# Altium PCB opm.PcbDoc (part 1 of 6)
Units mil, origin at the board's own origin, x right, y up, seen from the top; angles counter-clockwise.
Board outline 4280 x 1445 mil, 4 copper layers (Signal Plane 1, Ground, Power, Signal Plane 2), stack 59.778 mil thick; 104 components, 61 nets, 369 pads, 159 vias.
Unrouted connection lines stored in the file: 4.
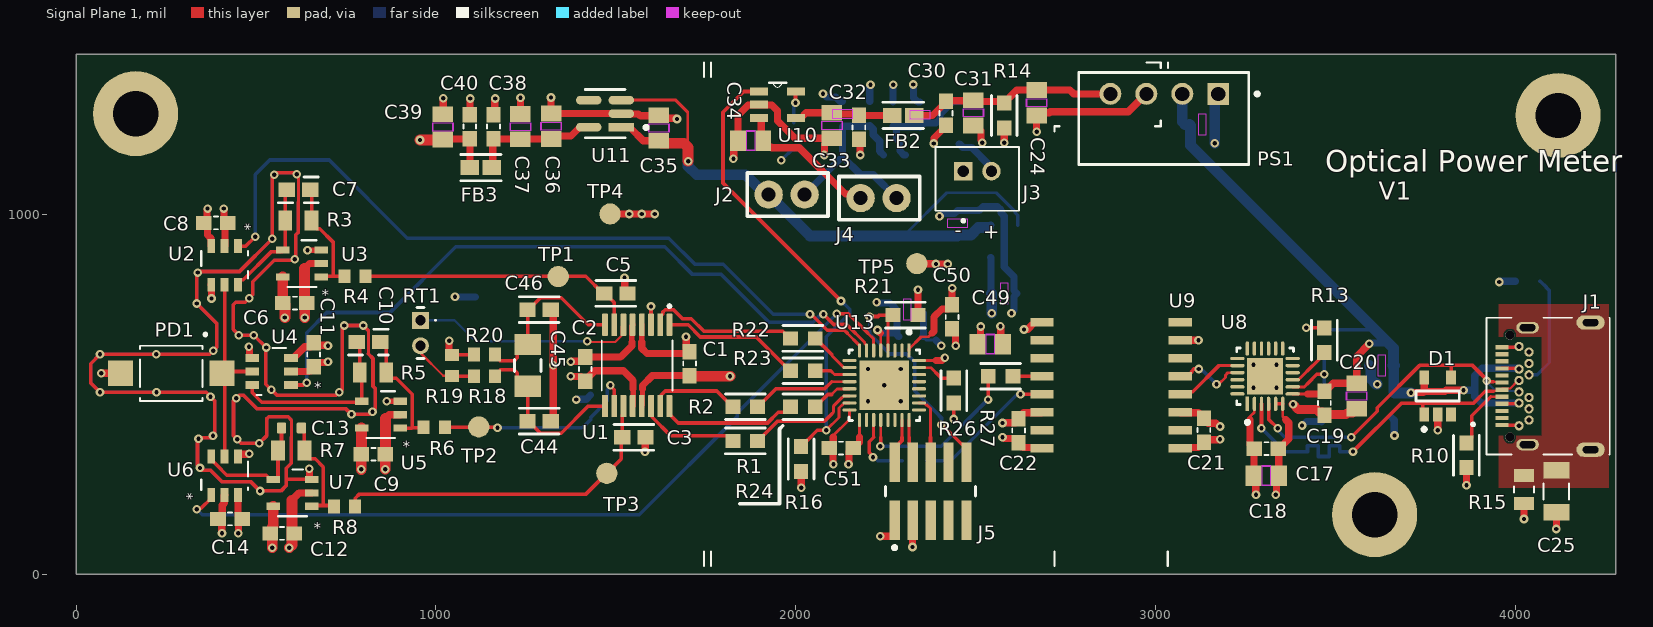
[diagram p0: Signal Plane 1 view]
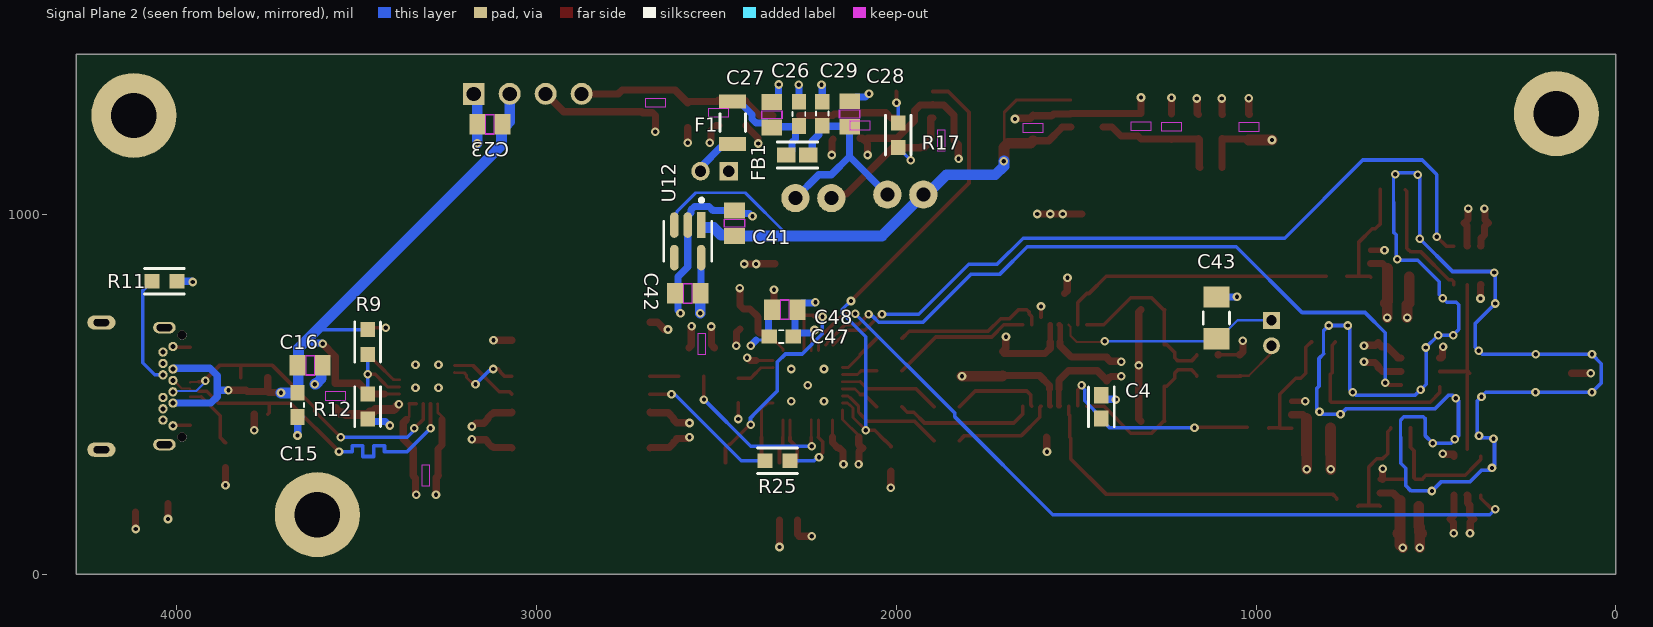
[diagram p1: Signal Plane 2 view, seen from below]
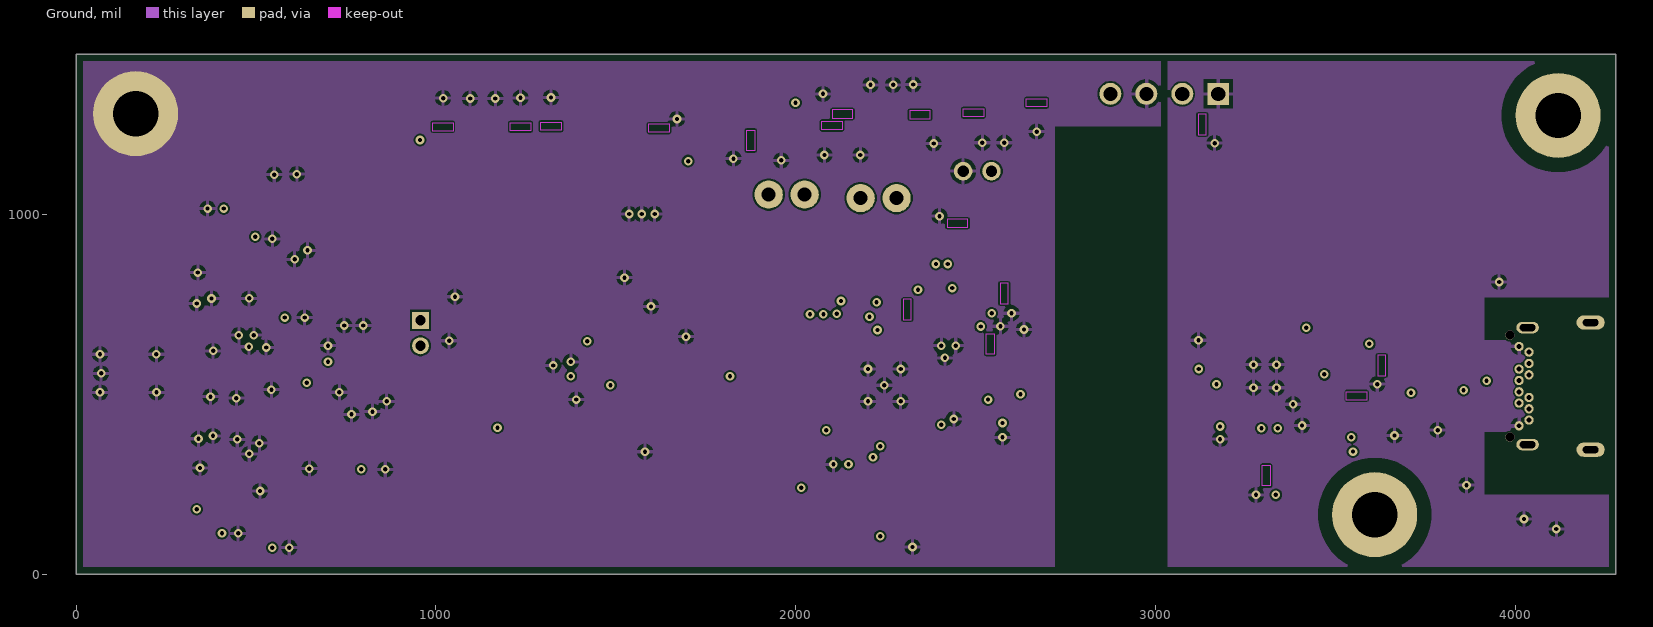
[diagram p2: Ground]
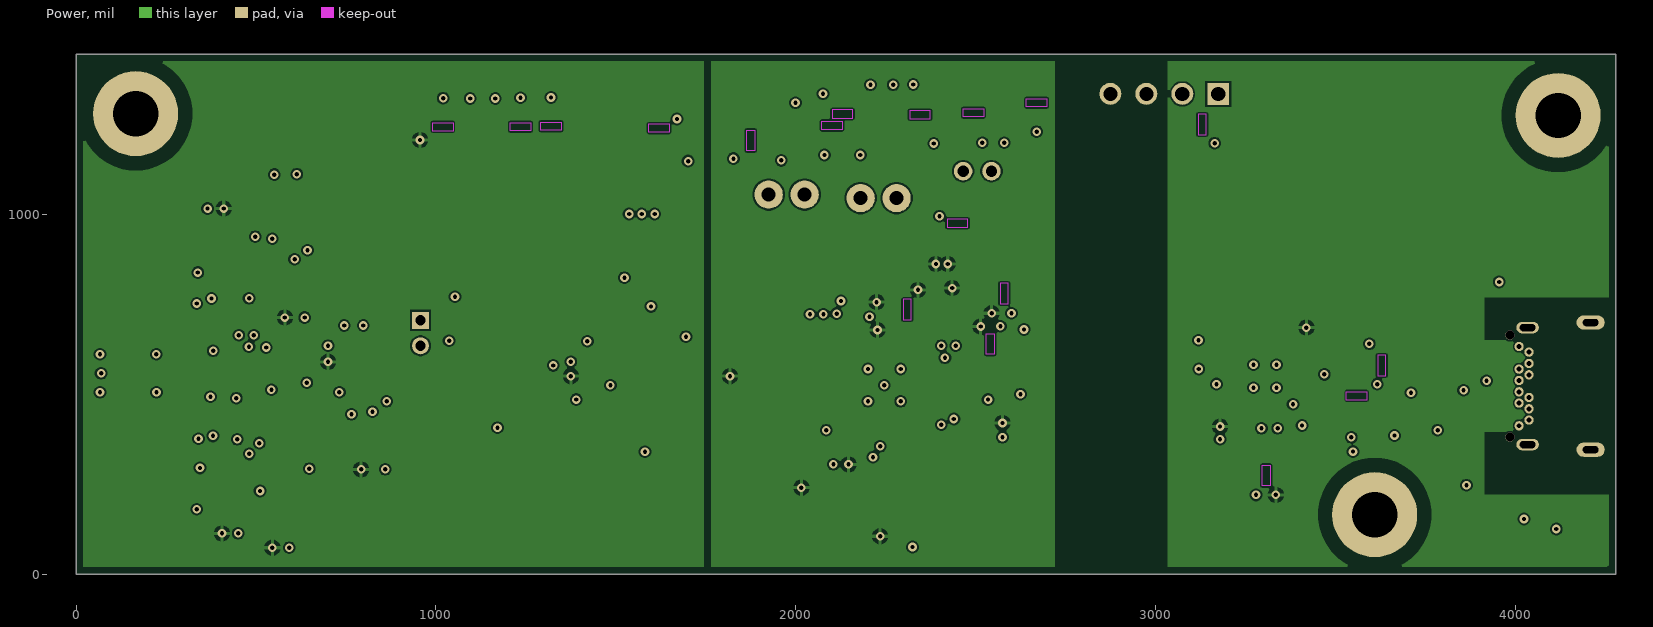
[diagram p3: Power]
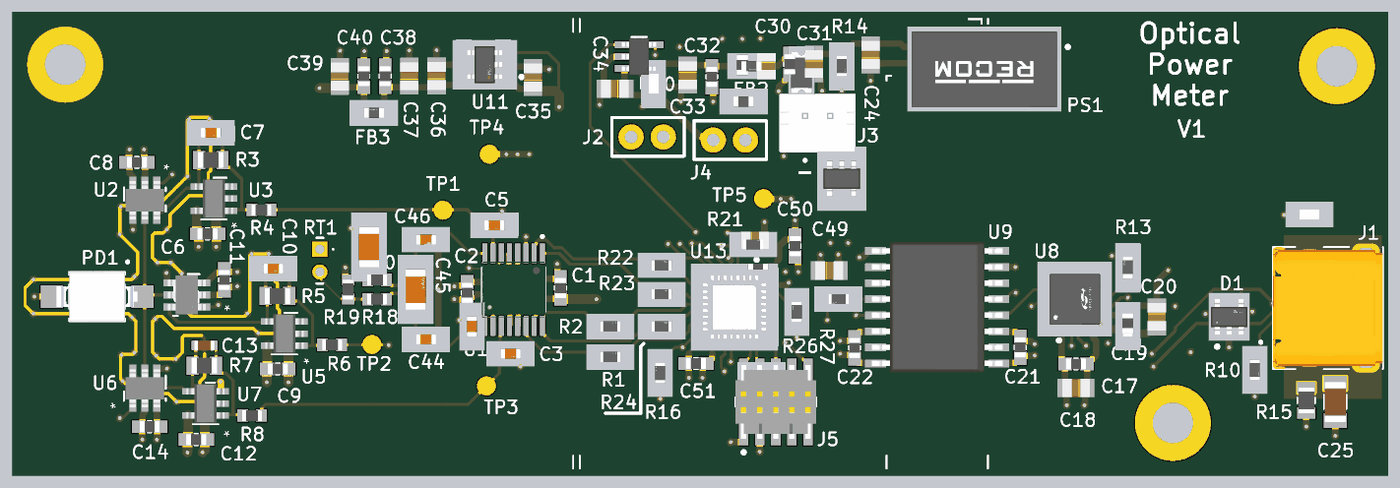
[diagram p5: 3D render of the assembled board from above, using the file's embedded part models]
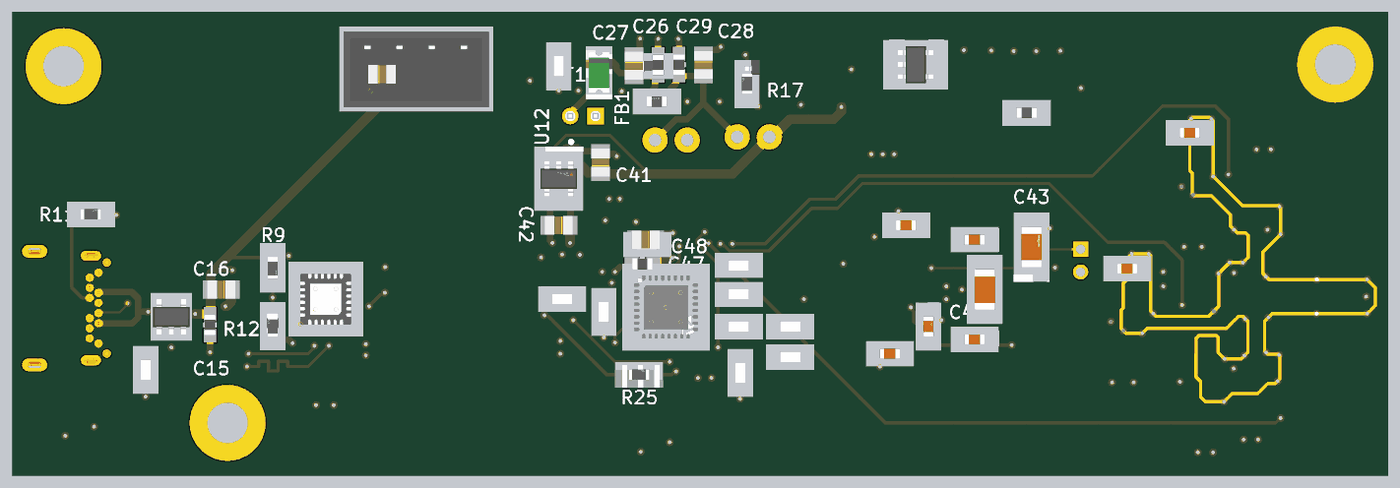
[diagram p6: 3D render of the assembled board from below, using the file's embedded part models]

## Layer stack, top to bottom
Top Solder: solder mask 0.4, Solder Resist, Dk 3.5
Signal Plane 1: signal copper 1.4
Dielectric 2: prepreg 7.8, PP-006, Dk 4.1
Ground: signal copper 0.689
Dielectric 1: dielectric 40, FR-4, Dk 4.8
Power: signal copper 0.689
Dielectric 3: prepreg 7.8, PP-006, Dk 4.1
Signal Plane 2: signal copper 1.4
Bottom Solder: solder mask 0.4, Solder Resist, Dk 3.5

## Board outline
0,0 0,1445 4280,1445 4280,0

## Design rules (kind name [scope] priority, off if disabled: settings)
Clearance Clearance_MountingHoles [IsPad AND (PadXSize_TopLayer > 236)] p1: gap=40 ignorepadtopadclearanceinfootprint=FALSE
Clearance Clearance_Power_to_Analog [InNetClass('Analog_Inputs') vs InNetClass('Power_Nets')] p2: gap=20 ignorepadtopadclearanceinfootprint=FALSE
Clearance [All] p3: gap=5 ignorepadtopadclearanceinfootprint=FALSE
DiffPairsRouting [All] p1: maxlimit=10 minlimit=10 mostfreqgap=10 toplayer_minwidth=6 toplayer_maxwidth=15 toplayer_prefwidth=15 midlayer1_minwidth=6 midlayer1_maxwidth=15 midlayer1_prefwidth=15 midlayer2_minwidth=6 midlayer2_maxwidth=15 midlayer2_prefwidth=15 bottomlayer_minwidth=6 bottomlayer_maxwidth=15 bottomlayer_prefwidth=15 maxuncoupledlength=500
PolygonConnect ShieldConnect [InNet('SHIELD_POUR')] p1: connectstyle=Direct reliefconductorwidth=10 reliefentries=4 polygonreliefangle="90 Angle" airgapwidth=10
PolygonConnect Faraday [IsPad AND (InNet('DGND')) AND (PadXSize_BottomLayer > 236)] p2: connectstyle=Direct reliefconductorwidth=10 reliefentries=4 polygonreliefangle="90 Angle" airgapwidth=10
PolygonConnect [All] p3: connectstyle=Relief reliefconductorwidth=10 reliefentries=4 polygonreliefangle="90 Angle" airgapwidth=10
RoomDefinition USB_Room [False] p1: confinementstyle=ConfineIn formatcopy=TRUE lockcomponents=FALSE outline 3940,405 3985,405 3985,645 3940,645
RoomDefinition CP2102_Room [False vs False] p2: confinementstyle=ConfineIn formatcopy=TRUE lockcomponents=FALSE outline 3423.18,669.21 3178.18,669.21 3178.18,429.21 3423.18,429.21
RoomDefinition ADC_Room_1 [False vs False] p3: confinementstyle=ConfineIn formatcopy=TRUE lockcomponents=FALSE outline 1450,735 1670,735 1670,645 1450,645
RoomDefinition ADC_Room_2 [False vs False] p4: confinementstyle=ConfineIn formatcopy=TRUE lockcomponents=FALSE outline 1450,425 1670,425 1670,515 1450,515
RoomDefinition STM32_Room [False vs False] p5: confinementstyle=ConfineIn formatcopy=TRUE lockcomponents=FALSE outline 2100,670 2390,670 2390,380 2100,380
RoutingVias [All] p1: holewidth=12 width=24 viastyle="Through Hole" minholewidth=12 minwidth=24 maxholewidth=12 maxwidth=24
SilkToSolderMaskClearance Silk_Clearance_Guard_Ring [InNet('DGND')] p1: minsilkscreentomaskgap=2 clearancetoexposedcopper=FALSE
SilkToSolderMaskClearance [IsPad] p2: minsilkscreentomaskgap=10 clearancetoexposedcopper=TRUE
SolderMaskExpansion [All] p1: expansion=4 istentingtop=FALSE
SupplyNets "Schematic Supply Nets_7" [InNet('+3V3_D')] p1: voltage=0.000
SupplyNets "Schematic Supply Nets_6" [InNet('DGND')] p2: voltage=0.000
SupplyNets "Schematic Supply Nets_5" [InNet('VBUS')] p3: voltage=0.000
SupplyNets "Schematic Supply Nets_4" [InNet('VBAT')] p4: voltage=0.000
SupplyNets "Schematic Supply Nets_3" [InNet('USB_GND')] p5: voltage=0.000
SupplyNets "Schematic Supply Nets_2" [InNet('VBUS_3V3')] p6: voltage=0.000
SupplyNets "Schematic Supply Nets_1" [InNet('+3V3_A')] p7: voltage=0.000
SupplyNets "Schematic Supply Nets" [InNet('VBUS_ISO')] p8: voltage=0.000
Width Width_USB_Pins [WithinRoom('USB_Room')] p1: maxlimit=10 minlimit=10 preferedwidth=10
Width Width_CP2102_Pins [WithinRoom('CP2102_Room')] p2: maxlimit=8 minlimit=8 preferedwidth=8
Width Width_ADC_Power [(WithinRoom('ADC_Room_1') or WithinRoom('ADC_Room_2')) and InNetClass('Power_Nets')] p3: maxlimit=15 minlimit=15 preferedwidth=15
Width Width_STM32_Pins [WithinRoom('STM32_Room')] p4: maxlimit=8 minlimit=8 preferedwidth=8
Width Power_Width [InNetClass('Power_Nets')] p5: maxlimit=30 minlimit=15 preferedwidth=20
Width [All] p6: maxlimit=10 minlimit=6 preferedwidth=10
28 further rules are at their usual default settings.

## Classes and differential pairs
net class Analog_Input: NetC7_1 NetC7_2 NetC10_1 NetC10_2 NetC13_1 NetC13_2 NetPD1_K
net class Power_Nets: +3V3_A +3V3_D DGND NetC26_1 NetC28_2 NetC32_2 NetC34_1 NetC36_1 NetF1_2 USB_GND VBAT VBUS VBUS_3V3 VBUS_ISO
component class U_TMP: C43 C44 C45 C46 R18 R19 R20 RT1
component class U_TIA3: C12 C13 C14 pvpt R7 R8 U6 U7
component class U_TIA2: C9 C10 C11 R5 R6 U4 U5
component class U_TIA1: C6 C7 C8 R3 R4 U2 U3
component class U_PWR_REG: C35 C36 C37 C38 C39 C40 C41 C42 FB3 U11 U12
component class U_MCU: C47 C48 C49 C50 C51 J5 R21 R22 R23 R24 R25 R26 R27 U13
component class U_INT: C15 C16 C17 C18 C19 C20 C21 C22 C23 C24 C25 D1 PS1 R9 R10 R11 R12 R13 R14 R15 U8 U9
component class U_CHARGE: C30 C31 C32 C33 C34 FB2 R16 R17 U10
component class U_BAT: C26 C27 C28 C29 F1 FB1 J2 J3 J4
component class U_AFE: C1 C2 C3 C4 C5 R1 R2 U1
differential pair D: +D_P -D_N
differential pair Temp: +Temp_P -Temp_N

## Components (designator, comment, footprint, x,y, rotation, side; value= is the part's Value field where it differs from the comment)
C1 "0.1uF" CC0603JRX7R8BB104 1705,585 r90 top value=100nF
C2 "0.1uF" CC0603JRX7R8BB104 1415,570 r90 top value=100nF
C3 "10nF" GRM1885C1H103JA01D 1550,380 r0 top
C4 "10nF" GRM1885C1H103JA01D 1430,465 r90 bottom
C5 "10nF" GRM1885C1H103JA01D 1500,780 r0 top
C6 "0.1uF" CC0603JRX7R8BB104 607.56,753.04 r0 top value=100nF
C7 "56pF" GCM1885C2A560JA16D 617.56,1068.04 r0 top
C8 "0.1uF" CC0603JRX7R8BB104 388,976 r180 top value=100nF
C9 "0.1uF" CC0603JRX7R8BB104 826,333 r0 top value=100nF
C10 "10pF" GCM1885C2A100JA16D 812,645 r0 top
C11 "0.1uF" CC0603JRX7R8BB104 660,610 r90 top value=100nF
C12 "0.1uF" CC0603JRX7R8BB104 572.56,113.04 r0 top value=100nF
C13 "3pF" AQ0603BRNPO9BN3R0 598,406 r0 top
C14 "0.1uF" CC0603JRX7R8BB104 427.56,153.04 r0 top value=100nF
C15 "0.1uF" CC0603JRX7R8BB104 3665,470 r270 bottom value=100nF
C16 "10uF" CC0805KKX7R7BB106 3630,580 r0 bottom value=10µF
C17 "0.1uF" CC0603JRX7R8BB104 3308.69,348.5 r180 top value=100nF
C18 "4.7uF" CC0805KKX7R7BB106 3308.69,273.5 r180 top value=4.7µF
C19 "0.1uF" CC0603JRX7R8BB104 3470,475 r270 top value=100nF
C20 "4.7uF" CC0805KKX7R7BB106 3560,495 r270 top value=4.7µF
C21 "0.1uF" CC0603JRX7R8BB104 3135,400 r270 top value=100nF
C22 "0.1uF" CC0603JRX7R8BB104 2620,398.46 r270 top value=100nF
C23 "10uF" CC0805KKX7R7BB106 3130,1250 r180 bottom value=10µF
C24 "10uF" CC0805KKX7R7BB106 2670,1310 r90 top value=10µF
C25 "4.7nF" CAPC3216X170N 4115,230 r90 top
C26 "0.1uF" CC0603JRX7R8BB104 2271,1279 r90 bottom value=100nF
C27 "10uF" CC0805KKX7R7BB106 2346,1277 r270 bottom value=10µF
C28 "10uF" CC0805KKX7R7BB106 2130,1279 r270 bottom value=10µF
C29 "0.1uF" CC0603JRX7R8BB104 2206,1280 r90 bottom value=100nF
C30 "0.1uF" CC0603JRX7R8BB104 2418,1281 r90 top value=100nF
C31 "10uF" CC0805KKX7R7BB106 2494,1282 r270 top value=10µF
C32 "0.1uF" CC0603JRX7R8BB104 2176,1242 r90 top value=100nF
C33 "4.7uF" CC0805KKX7R7BB106 2101,1247 r270 top value=4.7µF
C34 "4.7uF" CC0805KKX7R7BB106 1874.69,1205 r180 top value=4.7µF
C35 "1uF" CC0805KKX7R7BB106 1620,1240 r90 top value=1µF
C36 "1uF" CC0805KKX7R7BB106 1320,1245 r90 top value=1µF
C37 "4.7uF" CC0805KKX7R7BB106 1235,1244 r90 top value=4.7µF
C38 "0.1uF" CC0603JRX7R8BB104 1160,1244 r90 top value=100nF
C39 "4.7uF" CC0805KKX7R7BB106 1019,1243 r90 top value=4.7µF
C40 "0.1uF" CC0603JRX7R8BB104 1094,1244 r90 top value=100nF
C41 "1uF" CC0805KKX7R7BB106 2450,975 r90 bottom value=1µF
C42 "1uF" CC0805KKX7R7BB106 2580,780 r0 bottom value=1µF
C43 "100nF" GRM3195C1H104JA05D 1110,712 r90 bottom
C44 "10nF" GRM1885C1H103JA01D 1287,425 r0 top
C45 "100nF" GRM3195C1H104JA05D 1255,580 r90 top
C46 "10nF" GRM1885C1H103JA01D 1287,735 r0 top
C47 "10nF" CC0603JRX7R8BB104 2320,660 r0 bottom
C48 "1uF" CC0805KKX7R7BB106 2310,735 r0 bottom value=1µF
C49 "10uF" CC0805KKX7R7BB106 2541.31,639 r0 top value=10µF
C50 "0.1uF" CC0603JRX7R8BB104 2435,715 r270 top value=100nF
C51 "0.1uF" CC0603JRX7R8BB104 2126.54,350 r180 top value=100nF
D1 "SP0504BAHTG" SP0504BAHTG 3785,495 r90 top value=30pF
F1 "0ZCJ0050F2G" 0ZCJ0050FF2G 2455,1255 r270 bottom value=150mΩ
FB1 "BLM18AG601SN1D" BLM18AG601SN1D 2275,1165 r0 bottom value=380mΩ
FB2 "BLM18AG601SN1D" BLM18AG601SN1D 2299.45,1275 r0 top value=380mΩ
FB3 "BLM18AG601SN1D" BLM18AG601SN1D 1125,1130 r180 top value=380mΩ
J1 "10137062-00021LF" AMPHENOL_10137062-00021LF 4086.97,522.4 r90 top
J2 "Generic 1x2 2.54mm" "GENERIC 1X2 2.54mm" 1975,1055 r0 top
J3 "B2B-PH-K-S" JST_B2B-PH-K-S 2505,1120 r180 top
J4 "Generic 1x2 2.54mm" "GENERIC 1X2 2.54mm" 2230.58,1045.2 r0 top
J5 "FTSH-105-01-L-DV-K" SMTC-FTSH-105-01-L-DV-K_V 2375,230 r0 top
PD1 "VBPW34S" XDCR_VBPW34S 264,558 r180 top
PS1 "RFM-0505S" RFM-0505S 3025,1335 r180 top
R1 "47" RC0603FR-07 1860,370 r0 top value=47Ω
R2 "47" RC0603FR-07 1860,465 r0 top value=47Ω
R3 "10k" RESC2012X55N 617.56,983.04 r0 top value=10kΩ
R4 "1k" RESC1508X55N 775,828 r0 top value=1kΩ
R5 "100k" RESC2012X55N 825,560 r0 top value=100kΩ
R6 "1k" RESC1508X55N 995,408 r0 top value=1kΩ
R7 "1M" RESC2012X55N 597.56,343.04 r0 top value=1MΩ
R8 "1k" RESC1508X55N 746,188 r0 top value=1kΩ
R9 "22.1k" RC0603FR-07 3470,645 r270 bottom value=22.1kΩ
R10 "5.1k" RC0603FR-07 3865,330 r270 top value=5.1kΩ
R11 "5.1k" RC0603FR-07 4035,814 r180 bottom value=5.1kΩ
R12 "47.5k" RC0603FR-07 3470,465.48 r90 bottom value=47.5kΩ
R13 "1k" RC0603FR-07 3470,650 r90 top value=1kΩ
R14 "1k" RC0603FR-07 2580,1275 r270 top value=1kΩ
R15 "1M" RESC2012X50N 4025,235 r90 top value=1MΩ
R16 "10k" RC0603FR-07 2015,320 r90 top value=10kΩ
R17 "5.1k" RC0603FR-07 1994.69,1220 r90 bottom value=5.1kΩ
R18 "1k" RESC1508X55N 1135,550 r180 top value=1kΩ
R19 "100k" RESC1508X55N 1045,580 r90 top value=100kΩ
R20 "1k" RESC1508X55N 1135,610 r180 top value=1kΩ
R21 "10k" RC0603FR-07 2305,720 r0 top value=10kΩ
R22 "47" RC0603FR-07 2020,655 r0 top value=47Ω
R23 "47" RC0603FR-07 2020,565 r0 top value=47Ω
R24 "47" RC0603FR-07 2020,465 r0 top value=47Ω
R25 "47" RC0603FR-07 2330.48,315 r180 bottom value=47Ω
R26 "10k" RC0603FR-07 2440,510 r90 top value=10kΩ
R27 "47" RC0603FR-07 2570,550 r180 top value=47Ω
RT1 "100k" 104JT-025 957,670 r180 top value=100kΩ
U1 "ADS1220IPWR" ADS1220IPWR 1559.57,580 r270 top
U2 "TMUX1119DBVR" TMUX1119DBVR 412.56,858.04 r270 top
U3 "OPA392DBVR" OPA392DBVR 627.56,863.04 r180 top
U4 "TMUX1119DBVR" TMUX1119DBVR 543,563 r180 top
U5 "OPA392DBVR" OPA392DBVR 847,443 r180 top
U6 "TMUX1119DBVR" TMUX1119DBVR 412.56,273.04 r90 top
U7 "OPA392DBVR" OPA392DBVR 601.2,225.64 r180 top
U8 "CP2102N-A02-GQFN24R" CP2102N-A02-GQFN24R 3305,550 r90 top
U9 "ISO7721FDWR" ISO7721FDWR 2876.93,525 r180 top
U10 "MCP73831T-2ACI/OT" SOT95P280X145-5N 1949.69,1305 r0 top
U11 "TPS7A2033PDBVR" TPS7A2033PDBVR 1470,1280 r180 top
U12 "TPS7A2033PDBVR" TPS7A2033PDBVR 2580,925 r270 bottom
U13 "STM32L432KCU6" STM32L432KCU6 2246.51,524.84 r270 top

## Footprints (in the part's own frame and the unit in brackets; to place one, negate y for a bottom-side part, rotate by r counter-clockwise, add the part's x,y. Pads: shape width x height; smd on the part's side, far side on the other; paste and mask are expansions set on the pad)
0ZCJ0050FF2G [mm]
  rect 1x1.9 smd paste+0 mask+0: 1(-1.5,0) 2(1.5,0)
  silkscreen extent -0.62,-0.9 0.63,0.9, body extent -1.62,-0.82 1.63,0.82, height 0.55
104JT-025 [mm]
  rect 1.2x1.2 hole 0.73: 1(0,-0.9)
  round 1.2 hole 0.73: 2(0,0.9)
  silkscreen extent -1.1,-1.8 0.25,1.8
ADS1220IPWR [mm]
  rrect25% 1.57x0.41 smd: 1(-2.87,2.275) 2(-2.87,1.625) 3(-2.87,0.975) 4(-2.87,0.325) 5(-2.87,-0.325) 6(-2.87,-0.975) 7(-2.87,-1.625) 8(-2.87,-2.275) 9(2.87,-2.275) 10(2.87,-1.625) 11(2.87,-0.975) 12(2.87,-0.325) 13(2.87,0.325) 14(2.87,0.975) 15(2.87,1.625) 16(2.87,2.275)
  silkscreen extent -4.29,-2.5 1.77,2.5, body extent -3.2,-2.5 3.2,2.5, height 1.2
AMPHENOL_10137062-00021LF [mm]
  rect 0.3x0.9 smd: A1(-2.75,3.13) A2(-2.25,3.13) A3(-1.75,3.13) A4(-1.25,3.13) A5(-0.75,3.13) A6(-0.25,3.13) A7(0.25,3.13) A8(0.75,3.13) A9(1.25,3.13) A10(1.75,3.13) A11(2.25,3.13) A12(2.75,3.13)
  round 0.654 hole 0.349 mask+0.025: B1(2.8,1.92) B2(2.4,1.22) B3(1.6,1.22) B4(1.2,1.92) B5(0.8,1.22) B6(0.4,1.92) B7(-0.4,1.92) B8(-0.8,1.22) B9(-1.2,1.92) B10(-1.6,1.22) B11(-2.4,1.22) B12(-2.8,1.92)
  oval 0.8x1.6 hole 0.5 slot 1.1 at 90 deg: S1(-4.13,1.32) S2(4.13,1.32)
  oval 1x2 hole 0.5 slot 1.1 at 90 deg: S3(-4.49,-3.13) S4(4.49,-3.13)
  round 0.65 hole 0.65 unplated: ""(-3.6,2.57) ""(3.6,2.57)
  silkscreen extent -4.82,-4.48 4.83,5.27, body extent 0,-0.13 0,-0.13
AQ0603BRNPO9BN3R0 [mm]
  rrect25% 0.66x0.76 smd: 1(-0.7,0) 2(0.7,0)
  body extent -0.8,-0.4 0.8,0.4, height 0.95
BLM18AG601SN1D [mil]
  rect 51.42x41.66 smd paste+0 mask+0: 1(-30.55,0) 2(30.55,0)
  silkscreen extent -56,-37 56,37, body extent -31,-16 31,16, height 37
CAPC3216X170N [mm]
  rect 1.17x1.82 smd paste+0 mask+0.102: 1(-1.471,0) 2(1.471,0)
  silkscreen extent -0.57,-0.9 0.57,0.9, body extent -1.6,-0.85 1.6,0.85, height 1.59
CC0603JRX7R8BB104 [mm]
  rect 1.1x1 smd: 1(-0.85,0) 2(0.85,0)
  silkscreen extent -0.15,-0.45 0.15,0.45, body extent -0.8,-0.45 0.8,0.45, height 0.8
CC0805KKX7R7BB106 [mil]
  rect 44x57 smd paste+0 mask+0: 1(-35.31,0) 2(35.31,0)
  Signal Plane 1 keep-out region: -11.31,-26.5 -11.31,26.5 11.31,26.5 11.31,-26.5
  Keep-Out Layer region: -11.31,-28.5 -11.31,28.5 11.31,28.5 11.31,-28.5
  body extent -43,-29 43,29, height 57
CP2102N-A02-GQFN24R [mm]
  rect 1.01x0.239 smd paste+0 mask+0: 1(-1.951,1.25)
  rrect100% 1.01x0.239 smd paste+0 mask+0: 2(-1.951,0.75) 3(-1.951,0.25) 4(-1.951,-0.25) 5(-1.951,-0.75) 6(-1.951,-1.25) 13(1.951,-1.25) 14(1.951,-0.75) 15(1.951,-0.25) 16(1.951,0.25) 17(1.951,0.75) 18(1.951,1.25)
  rrect100% 0.239x1.01 smd paste+0 mask+0: 7(-1.25,-1.951) 8(-0.75,-1.951) 9(-0.25,-1.951) 10(0.25,-1.951) 11(0.75,-1.951) 12(1.25,-1.951) 19(1.25,1.951) 20(0.75,1.951) 21(0.25,1.951) 22(-0.25,1.951) 23(-0.75,1.951) 24(-1.25,1.951)
  rect 2.55x2.55 smd paste-1000 mask+0: 25(0,0)
  silkscreen extent -3.38,-2 2,2, body extent -2,-2 2,2, height 0.8
GCM1885C2A100JA16D [mil]
  rect 45.62x39.85 smd paste+0 mask+0: 1(-32.55,0) 2(32.55,0)
  silkscreen extent -55,-36 55,36, body extent -31,-16 31,16, height 35
GCM1885C2A560JA16D [mil]
  rect 45.62x39.85 smd paste+0 mask+0: 1(-32.55,0) 2(32.55,0)
  silkscreen extent -55,-36 55,36, body extent -31,-16 31,16, height 35
"GENERIC 1X2 2.54mm" [mm]
  round 2 hole 1: 1(-1.27,0) 2(1.27,0)
  silkscreen extent -2.79,-1.52 2.92,1.52
GRM1885C1H103JA01D [mil]
  rect 45.62x39.85 smd paste+0 mask+0: 1(-32.55,0) 2(32.55,0)
  silkscreen extent -55,-36 55,36, body extent -31,-16 31,16, height 35
GRM3195C1H104JA05D [mil]
  rect 59.28x73.16 smd paste+0 mask+0: 1(-58.12,0) 2(58.12,0)
  silkscreen extent -17,-37 17,37, body extent -63,-31 63,31, height 38
ISO7721FDWR [mm]
  rect 1.65x0.6 smd paste+0 mask+0: 1(-4.875,4.445) 2(-4.875,3.175) 3(-4.875,1.905) 4(-4.875,0.635) 5(-4.875,-0.635) 6(-4.875,-1.905) 7(-4.875,-3.175) 8(-4.875,-4.445) 9(4.875,-4.445) 10(4.875,-3.175) 11(4.875,-1.905) 12(4.875,-0.635) 13(4.875,0.635) 14(4.875,1.905) 15(4.875,3.175) 16(4.875,4.445)
  body extent -5.17,-5.15 5.16,5.15, height 2.59
JST_B2B-PH-K-S [mm]
  rect 1.308x1.308 / inner round 1.308 / far side rect 1.308x1.308 hole 0.8: 1(1,0)
  round 1.308 hole 0.8: 2(-1,0)
  silkscreen extent -2.95,-1.7 2.95,3.61, body extent -2.95,-1.7 2.95,2.8, height 6
OPA392DBVR [mil]
  rect 38.28x20 smd paste+0 mask+0: 1(-53.64,37.4) 2(-53.64,0) 3(-53.64,-37.4) 4(53.64,-37.4) 5(53.64,37.4)
  silkscreen extent -40,-65 39,65, body extent -59,-60 59,60, height 57
RC0603FR-07 [mil]
  rect 41.68x39.85 smd paste+0 mask+0: 1(-34.52,0) 2(34.52,0)
  silkscreen extent -55,-36 55,36, body extent -75,-40 75,40, height 10
RESC1508X55N [mm]
  rect 0.85x0.98 smd: 1(-0.75,0) 2(0.75,0)
  body extent -0.77,-0.43 0.77,0.43, height 0.54
RESC2012X50N [mm]
  rect 0.92x1.42 smd: 1(-1,0) 2(1,0)
  silkscreen extent -0.22,-0.7 0.22,0.7, body extent -1,-0.63 1,0.63, height 0.5
RESC2012X55N [mm]
  rect 0.97x1.42 smd paste+0 mask+0.102: 1(-0.93,0) 2(0.93,0)
  body extent -1,-0.63 1,0.63, height 0.55
RFM-0505S [mm]
  rect 1.55x1.55 hole 1 paste-2539.97 mask+0: 1(-3.81,0)
  round 1.55 hole 1 paste-2539.97 mask+0: 2(-1.27,0) 3(1.27,0) 4(3.81,0)
  silkscreen extent -6.69,-1.5 6.04,5, body extent -6.06,-1.6 6.14,5.1, height 0.25
SMTC-FTSH-105-01-L-DV-K_V [mm]
  rect 0.74x2.79 smd: 1(-2.54,-2.035) 2(-2.54,2.035) 3(-1.27,-2.035) 4(-1.27,2.035) 5(0,-2.035) 6(0,2.035) 7(1.27,-2.035) 8(1.27,2.035) 9(2.54,-2.035) 10(2.54,2.035)
  silkscreen extent -3.17,-4.1 3.17,0.34, body extent -3.17,-2.92 3.18,2.92, height 6.12
SOT95P280X145-5N [mil]
  rect 50x22 smd: 1(-51,37) 2(-51,0) 3(-51,-37) 4(51,-37) 5(51,37)
  silkscreen extent -24,49 24,61, body extent -53,-57 53,57, height 57
SP0504BAHTG [mm]
  rect 0.99x0.69 smd paste+0 mask+0: 1(-1.295,0.95) 2(-1.295,0) 3(-1.295,-0.95) 4(1.295,-0.95) 5(1.295,0.95)
  silkscreen extent -2.47,-1.53 0.35,1.53, body extent -1.89,-1.63 1.89,1.63, height 0.25
STM32L432KCU6 [mm]
  rect 1.01x0.222 smd paste+0 mask+0: 1(-2.451,1.75)
  rrect100% 1.01x0.222 smd paste+0 mask+0: 2(-2.451,1.25) 3(-2.451,0.75) 4(-2.451,0.25) 5(-2.451,-0.25) 6(-2.451,-0.75) 7(-2.451,-1.25) 8(-2.451,-1.75) 17(2.451,-1.75) 18(2.451,-1.25) 19(2.451,-0.75) 20(2.451,-0.25) 21(2.451,0.25) 22(2.451,0.75) 23(2.451,1.25) 24(2.451,1.75)
  rrect100% 0.222x1.01 smd paste+0 mask+0: 9(-1.75,-2.451) 10(-1.25,-2.451) 11(-0.75,-2.451) 12(-0.25,-2.451) 13(0.25,-2.451) 14(0.75,-2.451) 15(1.25,-2.451) 16(1.75,-2.451) 25(1.75,2.451) 26(1.25,2.451) 27(0.75,2.451) 28(0.25,2.451) 29(-0.25,2.451) 30(-0.75,2.451) 31(-1.25,2.451) 32(-1.75,2.451)
  rect 3.5x3.5 smd paste-1000 mask+0: 33(0,0)
  silkscreen extent -3.88,-2.5 2.5,2.5, body extent -2.5,-2.5 2.5,2.5, height 0.6
TMUX1119DBVR [mil]
  rect 38.5x22 smd paste+0 mask+0: 1(-53.75,37.4) 2(-53.75,0) 3(-53.75,-37.4) 4(53.75,-37.4) 5(53.75,0) 6(53.75,37.4)
  silkscreen extent -40,-65 36,65, body extent -59,-60 59,60, height 57
TPS7A2033PDBVR [mm]
  rect 1.805x0.612 smd paste+0 mask+0: 1(-1.15,0.95)
  rrect100% 1.805x0.612 smd paste+0 mask+0: 2(-1.15,0) 3(-1.15,-0.95) 4(1.15,-0.95) 5(1.15,0.95)
  silkscreen extent -3.03,-1.7 1.4,1.7, body extent -2.55,-1.95 2.55,1.95, height 0.25
XDCR_VBPW34S [mm]
  rect 1.75x1.8 smd: A(3.575,0) K(-3.575,0)
  silkscreen extent -2.51,-2.84 2.21,1.95, body extent -3.2,-1.95 3.2,1.95, height 1.4

## Part data
C1 C2 C6 C8 C9 C11 C12 C14 C15 C17 C19 C21 C22 C26 C29 C30 C32 C38 C40 C50 C51: library part CC0603JRX7R8BB104, "25V 100nF X7R ±5% 0603 Multilayer Ceramic Capacitors MLCC - SMD/SMT ROHS", Case Code (Imperial)=0603, Case Code (Metric)=1608, Dielectric=X7R, Dielectric Material=Ceramic, Manufacturer="Yageo Group", Max Operating Temperature=125°C, Min Operating Temperature=-55°C, Supplier Part Number=311-1777-1-ND, Tolerance=5%, Voltage Rating=25V, Case/Package=0603, Category="Ceramic Capacitors", China RoHS=Compliant, ComponentLink1Description=https://datasheet.octopart.com:443/CC0603JRX7R8BB104-Yageo-datasheet-177165144.pdf?src-supplier=IHS, ComponentLink1URL=https://datasheet.octopart.com:443/CC0603JRX7R8BB104-Yageo-datasheet-177165144.pdf?src-supplier=IHS, ComponentLink2Description=https://datasheet.octopart.com:443/CC0603JRX7R8BB104-Yageo-datasheet-147453679.pdf?src-supplier=Farnell, ComponentLink2URL=https://datasheet.octopart.com:443/CC0603JRX7R8BB104-Yageo-datasheet-147453679.pdf?src-supplier=Farnell, ComponentLink3Description=https://datasheet.octopart.com:443/CC0603JRX7R8BB104-Yageo-datasheet-181968346.pdf?src-supplier=Farnell, ComponentLink3URL=https://datasheet.octopart.com:443/CC0603JRX7R8BB104-Yageo-datasheet-181968346.pdf?src-supplier=Farnell, ComponentLink4Description=https://datasheet.octopart.com:443/CC0603JRX7R8BB104-Yageo-datasheet-151948686.pdf?src-supplier=TME, ComponentLink4URL=https://datasheet.octopart.com:443/CC0603JRX7R8BB104-Yageo-datasheet-151948686.pdf?src-supplier=TME, ComponentLink5Description=https://datasheet.octopart.com/CC0603JRX7R8BB104-Yageo-datasheet-12526321.pdf, ComponentLink5URL=https://datasheet.octopart.com/CC0603JRX7R8BB104-Yageo-datasheet-12526321.pdf, ComponentLink6Description=https://datasheet.octopart.com/CC0603JRX7R8BB104-Yageo-datasheet-10883670.pdf, ComponentLink6URL=https://datasheet.octopart.com/CC0603JRX7R8BB104-Yageo-datasheet-10883670.pdf, ComponentLink7Description=https://datasheet.octopart.com:443/CC0603JRX7R8BB104-Yageo-datasheet-166511530.pdf?src-supplier=Future+Electronics, ComponentLink7URL=https://datasheet.octopart.com:443/CC0603JRX7R8BB104-Yageo-datasheet-166511530.pdf?src-supplier=Future+Electronics, ComponentLink8Description=https://datasheet.octopart.com:443/CC0603JRX7R8BB104-Yageo-datasheet-137700082.pdf?src-supplier=Future+Electronics, ComponentLink8URL=https://datasheet.octopart.com:443/CC0603JRX7R8BB104-Yageo-datasheet-137700082.pdf?src-supplier=Future+Electronics, ComponentLink9Description=https://datasheet.octopart.com:443/CC0603JRX7R8BB104-Yageo-datasheet-137700084.pdf?src-supplier=Future+Electronics, ComponentLink9URL=https://datasheet.octopart.com:443/CC0603JRX7R8BB104-Yageo-datasheet-137700084.pdf?src-supplier=Future+Electronics, ComponentLink10Description=https://datasheet.octopart.com:443/CC0603JRX7R8BB104-Yageo-datasheet-27626582.pdf?src-supplier=Future+Electronics, ComponentLink10URL=https://datasheet.octopart.com:443/CC0603JRX7R8BB104-Yageo-datasheet-27626582.pdf?src-supplier=Future+Electronics, ComponentLink11Description=https://datasheet.octopart.com:443/CC0603JRX7R8BB104-Yageo-datasheet-15895757.pdf?src-supplier=Future+Electronics, ComponentLink11URL=https://datasheet.octopart.com:443/CC0603JRX7R8BB104-Yageo-datasheet-15895757.pdf?src-supplier=Future+Electronics, ComponentLink12Description=https://datasheet.octopart.com:443/CC0603JRX7R8BB104-Yageo-datasheet-10911834.pdf?src-supplier=Future+Electronics, ComponentLink12URL=https://datasheet.octopart.com:443/CC0603JRX7R8BB104-Yageo-datasheet-10911834.pdf?src-supplier=Future+Electronics, ComponentLink13Description=https://datasheet.octopart.com:443/CC0603JRX7R8BB104-Yageo-datasheet-8324442.pdf?src-supplier=Future+Electronics, ComponentLink13URL=https://datasheet.octopart.com:443/CC0603JRX7R8BB104-Yageo-datasheet-8324442.pdf?src-supplier=Future+Electronics, ComponentLink14Description=https://datasheet.octopart.com:443/CC0603JRX7R8BB104-Yageo-Group-datasheet-165992755.pdf?src-supplier=ODG+(Origin+Data+Global), ComponentLink14URL=https://datasheet.octopart.com:443/CC0603JRX7R8BB104-Yageo-Group-datasheet-165992755.pdf?src-supplier=ODG+(Origin+Data+Global), ComponentLink15Description=http://sigma.octopart.com:80/rohs_statement/Surface-Mount-Ceramic-Multilayer-Capacitors%3B-General-Purpose-%26-High-Capacitance-Class-2%2C-X7R-Yageo-family-124.pdf?src-supplier=Compliance+Statements, ComponentLink15URL=http://sigma.octopart.com:80/rohs_statement/Surface-Mount-Ceramic-Multilayer-Capacitors%3B-General-Purpose-%26-High-Capacitance-Class-2%2C-X7R-Yageo-family-124.pdf?src-supplier=Compliance+Statements, ComponentLink16Description=http://sigma.octopart.com:80/reach_statement/Surface-Mount-Ceramic-Multilayer-Capacitors%3B-General-Purpose-%26-High-Capacitance-Class-2%2C-X7R-Yageo-family-125.pdf?src-supplier=Compliance+Statements, ComponentLink16URL=http://sigma.octopart.com:80/reach_statement/Surface-Mount-Ceramic-Multilayer-Capacitors%3B-General-Purpose-%26-High-Capacitance-Class-2%2C-X7R-Yageo-family-125.pdf?src-supplier=Compliance+Statements, ComponentLink17Description=http://sigma.octopart.com:80/conflict_mineral_statement/Yageo-company-3.pdf?src-supplier=Compliance+Statements, ComponentLink17URL=http://sigma.octopart.com:80/conflict_mineral_statement/Yageo-company-3.pdf?src-supplier=Compliance+Statements, ComponentLink18Description=http://sigma.octopart.com:80/rohs_statement/Yageo-company-2.pdf?src-supplier=Compliance+Statements, ComponentLink18URL=http://sigma.octopart.com:80/rohs_statement/Yageo-company-2.pdf?src-supplier=Compliance+Statements, Composition=Ceramic, Depth=800µm, Halogen Free="Halogen Free", Height=800µm, Lead Free="Lead Free", Length=1.6mm, Lifecycle Status=Production, Manufacturer Part Number=CC0603JRX7R8BB104, Mounting Technology="Surface Mount", Number of Terminals=2, Pricing="1=0.1, 10=0.056, 50=0.0386, 100=0.0333, 500=0.02444, 1000=0.02172 (USD)", Radiation Hardening=No, REACH SVHC=Yes, RoHS=Compliant, Schedule B="8532240020, 8532240020|8532240020, 8532240020|8532240020|8532240020, 8532240020|8532240020|8532240020|8532240020", Stock=156739, Supplier=DigiKey, Supplier 1=DigiKey, Supplier Part Number 1=311-1777-1-ND, Termination=SMD/SMT, Thickness=889µm, Voltage Rating (DC)=25V, Weight=2.012816mg, Width=800µm
C3 C4 C5 C44 C46: library part GRM1885C1H103JA01D, "Multilayer Ceramic Capacitor, Grm Series, 0.01 F, 5%, C0g / Np0, 50 V, 0603 [1608 Metric]", Case Code (Imperial)=0603, Case Code (Metric)=1608, Dielectric=C0G, Dielectric Material=Ceramic, Manufacturer=Murata, Manufacturer Lifecycle Status="IN PRODUCTION", Max Operating Temperature=125°C, Min Operating Temperature=-55°C, Supplier Part Number=490-9666-1-ND, Temperature Coefficient=30ppm/°C, Tolerance=5%, Voltage=50V, Case/Package=0603, Category="Ceramic Capacitors", ComponentLink1Description=https://datasheet.octopart.com:443/GRM1885C1H103JA01D-Murata-datasheet-34231350.pdf?src-supplier=Newark, ComponentLink1URL=https://datasheet.octopart.com:443/GRM1885C1H103JA01D-Murata-datasheet-34231350.pdf?src-supplier=Newark, ComponentLink2Description=https://datasheet.octopart.com:443/GRM1885C1H103JA01D-Murata-datasheet-62317145.pdf?src-supplier=element14+APAC, ComponentLink2URL=https://datasheet.octopart.com:443/GRM1885C1H103JA01D-Murata-datasheet-62317145.pdf?src-supplier=element14+APAC, ComponentLink3Description=https://datasheet.octopart.com:443/GRM1885C1H103JA01D-Murata-datasheet-15634865.pdf?src-supplier=Future+Electronics, ComponentLink3URL=https://datasheet.octopart.com:443/GRM1885C1H103JA01D-Murata-datasheet-15634865.pdf?src-supplier=Future+Electronics, ComponentLink4Description=https://datasheet.octopart.com:443/GRM1885C1H103JA01D-Murata-datasheet-22122223.pdf?src-supplier=Future+Electronics, ComponentLink4URL=https://datasheet.octopart.com:443/GRM1885C1H103JA01D-Murata-datasheet-22122223.pdf?src-supplier=Future+Electronics, ComponentLink5Description=https://datasheet.octopart.com:443/GRM1885C1H103JA01D-Murata-datasheet-44106831.pdf?src-supplier=Future+Electronics, ComponentLink5URL=https://datasheet.octopart.com:443/GRM1885C1H103JA01D-Murata-datasheet-44106831.pdf?src-supplier=Future+Electronics, ComponentLink6Description=https://datasheet.octopart.com:443/GRM1885C1H103JA01D-Murata-datasheet-165579666.pdf?src-supplier=TME, ComponentLink6URL=https://datasheet.octopart.com:443/GRM1885C1H103JA01D-Murata-datasheet-165579666.pdf?src-supplier=TME, ComponentLink7Description=https://datasheet.octopart.com:443/GRM1885C1H103JA01D-Murata-datasheet-86177052.pdf?src-supplier=TME, ComponentLink7URL=https://datasheet.octopart.com:443/GRM1885C1H103JA01D-Murata-datasheet-86177052.pdf?src-supplier=TME, ComponentLink8Description=https://datasheet.octopart.com:443/GRM1885C1H103JA01D-Murata-datasheet-141274262.pdf?src-supplier=Ciiva, ComponentLink8URL=https://datasheet.octopart.com:443/GRM1885C1H103JA01D-Murata-datasheet-141274262.pdf?src-supplier=Ciiva, ComponentLink9Description=https://datasheet.octopart.com:443/GRM1885C1H103JA01D-Murata-datasheet-140695819.pdf?src-supplier=Ciiva, ComponentLink9URL=https://datasheet.octopart.com:443/GRM1885C1H103JA01D-Murata-datasheet-140695819.pdf?src-supplier=Ciiva, ComponentLink10Description=https://datasheet.octopart.com:443/GRM1885C1H103JA01D-Murata-datasheet-138741457.pdf?src-supplier=Ciiva, ComponentLink10URL=https://datasheet.octopart.com:443/GRM1885C1H103JA01D-Murata-datasheet-138741457.pdf?src-supplier=Ciiva, ComponentLink11Description=https://datasheet.octopart.com/GRM1885C1H103JA01D-Murata-datasheet-12515295.pdf, ComponentLink11URL=https://datasheet.octopart.com/GRM1885C1H103JA01D-Murata-datasheet-12515295.pdf, ComponentLink12Description=https://datasheet.octopart.com/GRM1885C1H103JA01D-Murata-datasheet-12510076.pdf, ComponentLink12URL=https://datasheet.octopart.com/GRM1885C1H103JA01D-Murata-datasheet-12510076.pdf, ComponentLink13Description=https://datasheet.octopart.com/GRM1885C1H103JA01D-Murata-datasheet-11978611.pdf, ComponentLink13URL=https://datasheet.octopart.com/GRM1885C1H103JA01D-Murata-datasheet-11978611.pdf, ComponentLink14Description=https://datasheet.octopart.com/GRM1885C1H103JA01D-Murata-datasheet-10025737.pdf, ComponentLink14URL=https://datasheet.octopart.com/GRM1885C1H103JA01D-Murata-datasheet-10025737.pdf, ComponentLink15Description=https://datasheet.octopart.com/GRM1885C1H103JA01D-Murata-datasheet-8819587.pdf, ComponentLink15URL=https://datasheet.octopart.com/GRM1885C1H103JA01D-Murata-datasheet-8819587.pdf, ComponentLink16Description=http://sigma.octopart.com:80/reach_statement/Murata-company-16.pdf?src-supplier=Compliance+Statements, ComponentLink16URL=http://sigma.octopart.com:80/reach_statement/Murata-company-16.pdf?src-supplier=Compliance+Statements, Depth=800µm, Height=800µm, Lead Free="Lead Free", Lead Pitch=500µm, Length=1.6mm, Lifecycle Status=Production, Manufacturer Part Number=GRM1885C1H103JA01D, Material=Ceramic, Mounting Technology="Surface Mount", Number of Terminals=2, Packaging="Cut Tape", Pricing="1=0.12, 10=0.064, 50=0.0446, 100=0.0386, 500=0.02864, 1000=0.02721 (USD)", REACH SVHC=Yes, RoHS=Compliant, Schedule B="8532240020, 8532240020|8532240020, 8532240020|8532240020|8532240020, 8532240020|8532240020|8532240020|8532240020", Stock=561745, Supplier=DigiKey, Supplier 1=DigiKey, Supplier Part Number 1=490-9666-1-ND, Termination=SMD/SMT, Thickness=800µm, Voltage Rating=50V, Voltage Rating (DC)=50V, Width=800µm
C7: library part GCM1885C2A560JA16D, "100V 56pF C0G ±5% 0603 Multilayer Ceramic Capacitors MLCC - SMD/SMT ROHS", Case Code (Imperial)=0603, Case Code (Metric)=1608, Dielectric=C0G, Dielectric Material=Ceramic, Manufacturer=Murata, Manufacturer Lifecycle Status="IN PRODUCTION", Max Operating Temperature=125°C, Min Operating Temperature=-55°C, Ratings=AEC-Q200, Supplier Part Number=490-17769-1-ND, Temperature Coefficient=30ppm/°C, Tolerance=5%, Voltage Rating=100V, Case/Package=0603, Category="Ceramic Capacitors", ComponentLink1Description=https://datasheet.octopart.com:443/GCM1885C2A560JA16D-Murata-datasheet-149522658.pdf?src-supplier=Newark, ComponentLink1URL=https://datasheet.octopart.com:443/GCM1885C2A560JA16D-Murata-datasheet-149522658.pdf?src-supplier=Newark, ComponentLink2Description=https://datasheet.octopart.com:443/GCM1885C2A560JA16D-Murata-datasheet-141266699.pdf?src-supplier=Geoflip, ComponentLink2URL=https://datasheet.octopart.com:443/GCM1885C2A560JA16D-Murata-datasheet-141266699.pdf?src-supplier=Geoflip, ComponentLink3Description=https://datasheet.octopart.com:443/GCM1885C2A560JA16D-Murata-datasheet-140657613.pdf?src-supplier=Ciiva, ComponentLink3URL=https://datasheet.octopart.com:443/GCM1885C2A560JA16D-Murata-datasheet-140657613.pdf?src-supplier=Ciiva, ComponentLink4Description=https://datasheet.octopart.com:443/GCM1885C2A560JA16D-Murata-datasheet-138717257.pdf?src-supplier=Ciiva, ComponentLink4URL=https://datasheet.octopart.com:443/GCM1885C2A560JA16D-Murata-datasheet-138717257.pdf?src-supplier=Ciiva, ComponentLink5Description=https://datasheet.octopart.com:443/GCM1885C2A560JA16D-Murata-datasheet-12511495.pdf?src-supplier=TME, ComponentLink5URL=https://datasheet.octopart.com:443/GCM1885C2A560JA16D-Murata-datasheet-12511495.pdf?src-supplier=TME, ComponentLink6Description=https://datasheet.octopart.com/GCM1885C2A560JA16D-Murata-datasheet-14404419.pdf, ComponentLink6URL=https://datasheet.octopart.com/GCM1885C2A560JA16D-Murata-datasheet-14404419.pdf, ComponentLink7Description=http://sigma.octopart.com:80/reach_statement/Murata-company-16.pdf?src-supplier=Compliance+Statements, ComponentLink7URL=http://sigma.octopart.com:80/reach_statement/Murata-company-16.pdf?src-supplier=Compliance+Statements, Depth=800µm, Export Control Classification Number (ECCN) Code=EAR99, Harmonized Tariff Schedule (HTS) Code=8532.24.00.20, Height=800µm, Introduction Date=2007-06-21, Length=1.6mm, Lifecycle Status=Production, Manufacturer Part Number=GCM1885C2A560JA16D, Material=Ceramic, Mounting Technology="Surface Mount", Number of Terminals=2, Packaging="Tape & Reel", Pricing="1=0.1, 10=0.038, 50=0.0258, 100=0.0221, 500=0.0159, 1000=0.01478 (USD)", Radiation Hardening=No, REACH SVHC=Yes, RoHS=Compliant, Stock=34150, Supplier=DigiKey, Supplier 1=DigiKey, Supplier Part Number 1=490-17769-1-ND, Termination=SMD/SMT, Voltage Rating (DC)=100V, Width=800µm
C10: library part GCM1885C2A100JA16D, "100V 10pF C0G ±5% 0603 Multilayer Ceramic Capacitors MLCC - SMD/SMT ROHS", Case Code (Imperial)=0603, Case Code (Metric)=1608, Dielectric=C0G, Dielectric Material=Ceramic, Manufacturer=Murata, Manufacturer Lifecycle Status="IN PRODUCTION", Max Operating Temperature=125°C, Min Operating Temperature=-55°C, Ratings=AEC-Q200, Supplier Part Number=490-4770-1-ND, Temperature Coefficient=30ppm/°C, Tolerance=5%, Voltage Rating=100V, Case/Package=0603, Category="Ceramic Capacitors", ComponentLink1Description=https://datasheet.octopart.com:443/GCM1885C2A100JA16D-Murata-datasheet-149522596.pdf?src-supplier=element14+APAC, ComponentLink1URL=https://datasheet.octopart.com:443/GCM1885C2A100JA16D-Murata-datasheet-149522596.pdf?src-supplier=element14+APAC, ComponentLink2Description=https://datasheet.octopart.com:443/GCM1885C2A100JA16D-Murata-datasheet-141266547.pdf?src-supplier=Geoflip, ComponentLink2URL=https://datasheet.octopart.com:443/GCM1885C2A100JA16D-Murata-datasheet-141266547.pdf?src-supplier=Geoflip, ComponentLink3Description=https://datasheet.octopart.com:443/GCM1885C2A100JA16D-Murata-datasheet-14404396.pdf?src-supplier=Future+Electronics, ComponentLink3URL=https://datasheet.octopart.com:443/GCM1885C2A100JA16D-Murata-datasheet-14404396.pdf?src-supplier=Future+Electronics, ComponentLink4Description=https://datasheet.octopart.com:443/GCM1885C2A100JA16D-Murata-datasheet-44104434.pdf?src-supplier=Future+Electronics, ComponentLink4URL=https://datasheet.octopart.com:443/GCM1885C2A100JA16D-Murata-datasheet-44104434.pdf?src-supplier=Future+Electronics, ComponentLink5Description=https://datasheet.octopart.com:443/GCM1885C2A100JA16D-Murata-datasheet-140657391.pdf?src-supplier=Ciiva, ComponentLink5URL=https://datasheet.octopart.com:443/GCM1885C2A100JA16D-Murata-datasheet-140657391.pdf?src-supplier=Ciiva, ComponentLink6Description=https://datasheet.octopart.com:443/GCM1885C2A100JA16D-Murata-datasheet-138717048.pdf?src-supplier=Ciiva, ComponentLink6URL=https://datasheet.octopart.com:443/GCM1885C2A100JA16D-Murata-datasheet-138717048.pdf?src-supplier=Ciiva, ComponentLink7Description=https://datasheet.octopart.com:443/GCM1885C2A100JA16D-Murata-datasheet-150009059.pdf?src-supplier=Arrow.cn, ComponentLink7URL=https://datasheet.octopart.com:443/GCM1885C2A100JA16D-Murata-datasheet-150009059.pdf?src-supplier=Arrow.cn, ComponentLink8Description=https://datasheet.octopart.com:443/GCM1885C2A100JA16D-Murata-datasheet-11892650.pdf?src-supplier=Arrow+Electronics, ComponentLink8URL=https://datasheet.octopart.com:443/GCM1885C2A100JA16D-Murata-datasheet-11892650.pdf?src-supplier=Arrow+Electronics, ComponentLink9Description=https://datasheet.octopart.com:443/GCM1885C2A100JA16D-Murata-datasheet-12511495.pdf?src-supplier=TME, ComponentLink9URL=https://datasheet.octopart.com:443/GCM1885C2A100JA16D-Murata-datasheet-12511495.pdf?src-supplier=TME, ComponentLink10Description=http://sigma.octopart.com:80/reach_statement/Murata-company-16.pdf?src-supplier=Compliance+Statements, ComponentLink10URL=http://sigma.octopart.com:80/reach_statement/Murata-company-16.pdf?src-supplier=Compliance+Statements, Depth=800µm, Height=800µm, Lead Free="Lead Free", Length=1.6mm, Lifecycle Status=Production, Manufacturer Part Number=GCM1885C2A100JA16D, Material=Ceramic, Mounting Technology="Surface Mount", Number of Terminals=2, Pricing="1=0.11, 10=0.059, 50=0.041, 100=0.0355, 500=0.02614, 1000=0.02328 (USD)", Radiation Hardening=No, REACH SVHC=Yes, RoHS=Compliant, Schedule B="8532240020, 8532240020|8532240020, 8532240020|8532240020|8532240020, 8532240020|8532240020|8532240020|8532240020", Stock=71457, Supplier=DigiKey, Supplier 1=DigiKey, Supplier Part Number 1=490-4770-1-ND, Termination=SMD/SMT, Voltage Rating (DC)=100V, Width=800µm
C13: library part AQ0603BRNPO9BN3R0, "Cap, 3Pf, 50V, Mlcc, 0603 Rohs Compliant: Yes", Dielectric Material=Ceramic, Manufacturer="Yageo Group", Max Operating Temperature=125°C, Min Operating Temperature=-55°C, Supplier Part Number=13-AQ0603BRNPO9BN3R0CT-ND, Voltage Rating (DC)=50V, Category="Ceramic Capacitors", China RoHS=Compliant, ComponentLink1Description=https://datasheet.octopart.com:443/AQ0603BRNPO9BN3R0-Yageo-datasheet-182140182.pdf?src-supplier=IHS, ComponentLink1URL=https://datasheet.octopart.com:443/AQ0603BRNPO9BN3R0-Yageo-datasheet-182140182.pdf?src-supplier=IHS, ComponentLink2Description=https://datasheet.octopart.com:443/AQ0603BRNPO9BN3R0-Yageo-datasheet-181965405.pdf?src-supplier=Farnell, ComponentLink2URL=https://datasheet.octopart.com:443/AQ0603BRNPO9BN3R0-Yageo-datasheet-181965405.pdf?src-supplier=Farnell, ComponentLink3Description=https://datasheet.octopart.com:443/AQ0603BRNPO9BN3R0-Yageo-datasheet-181965404.pdf?src-supplier=Farnell, ComponentLink3URL=https://datasheet.octopart.com:443/AQ0603BRNPO9BN3R0-Yageo-datasheet-181965404.pdf?src-supplier=Farnell, ComponentLink4Description=https://datasheet.octopart.com:443/AQ0603BRNPO9BN3R0-Yageo-datasheet-170333969.pdf?src-supplier=Newark, ComponentLink4URL=https://datasheet.octopart.com:443/AQ0603BRNPO9BN3R0-Yageo-datasheet-170333969.pdf?src-supplier=Newark, ComponentLink5Description=http://sigma.octopart.com:80/conflict_mineral_statement/Yageo-company-3.pdf?src-supplier=Compliance+Statements, ComponentLink5URL=http://sigma.octopart.com:80/conflict_mineral_statement/Yageo-company-3.pdf?src-supplier=Compliance+Statements, ComponentLink6Description=http://sigma.octopart.com:80/rohs_statement/Yageo-company-2.pdf?src-supplier=Compliance+Statements, ComponentLink6URL=http://sigma.octopart.com:80/rohs_statement/Yageo-company-2.pdf?src-supplier=Compliance+Statements, Country of Origin="Mainland China, Taiwan", Export Control Classification Number (ECCN) Code=EAR99, Harmonized Tariff Schedule (HTS) Code=8532.24.00.20, Height=800µm, Introduction Date=2018-12-19, Length=1.6mm, Lifecycle Status=Production, Manufacturer Part Number=AQ0603BRNPO9BN3R0, Mounting Technology="Surface Mount", Number of Terminals=2, Pricing="1=0.28, 10=0.167, 50=0.1212, 100=0.1071, 500=0.0836, 1000=0.07633 (USD)", REACH SVHC=Yes, RoHS=Compliant, Stock=25039, Supplier=DigiKey, Supplier 1=DigiKey, Supplier Part Number 1=13-AQ0603BRNPO9BN3R0CT-ND, Width=800µm
C16 C23 C24 C27 C28 C31 C49: library part CC0805KKX7R7BB106, "16V 10uF X7R ±10% 0805 Multilayer Ceramic Capacitors MLCC - SMD/SMT ROHS", Case/Package=0805, Dielectric=X7R, Dielectric Material=Ceramic, Manufacturer="Yageo Group", Max Operating Temperature=125°C, Min Operating Temperature=-55°C, Supplier Part Number=311-3501-1-ND, Voltage Rating (DC)=16V, Category="Ceramic Capacitors", China RoHS=Compliant, ComponentLink1Description=https://datasheet.octopart.com:443/CC0805KKX7R7BB106-Yageo-datasheet-177165144.pdf?src-supplier=IHS, ComponentLink1URL=https://datasheet.octopart.com:443/CC0805KKX7R7BB106-Yageo-datasheet-177165144.pdf?src-supplier=IHS, ComponentLink2Description=https://datasheet.octopart.com:443/CC0805KKX7R7BB106-Yageo-Group-datasheet-189192896.pdf?src-supplier=TME, ComponentLink2URL=https://datasheet.octopart.com:443/CC0805KKX7R7BB106-Yageo-Group-datasheet-189192896.pdf?src-supplier=TME, ComponentLink3Description=https://datasheet.octopart.com:443/CC0805KKX7R7BB106-Yageo-datasheet-147453679.pdf?src-supplier=Farnell, ComponentLink3URL=https://datasheet.octopart.com:443/CC0805KKX7R7BB106-Yageo-datasheet-147453679.pdf?src-supplier=Farnell, ComponentLink4Description=https://datasheet.octopart.com:443/CC0805KKX7R7BB106-Yageo-datasheet-181969636.pdf?src-supplier=Farnell, ComponentLink4URL=https://datasheet.octopart.com:443/CC0805KKX7R7BB106-Yageo-datasheet-181969636.pdf?src-supplier=Farnell, ComponentLink5Description=https://datasheet.octopart.com:443/CC0805KKX7R7BB106-Yageo-datasheet-151948686.pdf?src-supplier=Farnell, ComponentLink5URL=https://datasheet.octopart.com:443/CC0805KKX7R7BB106-Yageo-datasheet-151948686.pdf?src-supplier=Farnell, ComponentLink6Description=https://datasheet.octopart.com:443/CC0805KKX7R7BB106-Yageo-datasheet-166511530.pdf?src-supplier=Future+Electronics, ComponentLink6URL=https://datasheet.octopart.com:443/CC0805KKX7R7BB106-Yageo-datasheet-166511530.pdf?src-supplier=Future+Electronics, ComponentLink7Description=https://datasheet.octopart.com:443/CC0805KKX7R7BB106-Yageo-Group-datasheet-165992755.pdf?src-supplier=ODG+(Origin+Data+Global), ComponentLink7URL=https://datasheet.octopart.com:443/CC0805KKX7R7BB106-Yageo-Group-datasheet-165992755.pdf?src-supplier=ODG+(Origin+Data+Global), ComponentLink8Description=https://datasheet.octopart.com/CC0805KKX7R7BB106-Yageo-datasheet-10883670.pdf, ComponentLink8URL=https://datasheet.octopart.com/CC0805KKX7R7BB106-Yageo-datasheet-10883670.pdf, ComponentLink9Description=http://sigma.octopart.com:80/conflict_mineral_statement/Yageo-company-3.pdf?src-supplier=Compliance+Statements, ComponentLink9URL=http://sigma.octopart.com:80/conflict_mineral_statement/Yageo-company-3.pdf?src-supplier=Compliance+Statements, ComponentLink10Description=http://sigma.octopart.com:80/rohs_statement/Yageo-company-2.pdf?src-supplier=Compliance+Statements, ComponentLink10URL=http://sigma.octopart.com:80/rohs_statement/Yageo-company-2.pdf?src-supplier=Compliance+Statements, Country of Origin="Mainland China, Taiwan", Export Control Classification Number (ECCN) Code=EAR99, Halogen Free="Halogen Free", Harmonized Tariff Schedule (HTS) Code=8532.24.00.20, Height=1.25mm, Introduction Date=2013-05-20, Lead Free="Lead Free", Length=2mm, Lifecycle Status=Production, Manufacturer Part Number=CC0805KKX7R7BB106, Mounting Technology="Surface Mount", Number of Terminals=2, Pricing="1=0.54, 10=0.329, 50=0.2472, 100=0.2222, 500=0.17992, 1000=0.16687 (USD)", REACH SVHC=Yes, RoHS=Compliant, Stock=2785, Supplier=DigiKey, Supplier 1=DigiKey, Supplier Part Number 1=311-3501-1-ND, Width=1.25mm
C18 C20 C33 C34 C37 C39: library part CC0805KKX7R7BB475, "16V 4.7uF X7R ±10% 0805 Multilayer Ceramic Capacitors MLCC - SMD/SMT ROHS", Case Code (Imperial)=0805, Case Code (Metric)=2012, Dielectric=X7R, Dielectric Material=Ceramic, Manufacturer="Yageo Group", Manufacturer Package Identifier=CC0805-0.85, Max Operating Temperature=125°C, Min Operating Temperature=-55°C, Supplier Part Number=311-1883-1-ND, Supplier Part Number 1=311-1883-6-ND, Tolerance=10%, Voltage Rating=16V, Case/Package=0805, Category="Ceramic Capacitors", China RoHS=Compliant, ComponentLink1Description=https://datasheet.octopart.com:443/CC0805KKX7R7BB475-Yageo-datasheet-177165144.pdf?src-supplier=IHS, ComponentLink1URL=https://datasheet.octopart.com:443/CC0805KKX7R7BB475-Yageo-datasheet-177165144.pdf?src-supplier=IHS, ComponentLink2Description=https://datasheet.octopart.com:443/CC0805KKX7R7BB475-Yageo-datasheet-78855689.pdf?src-supplier=Upverter, ComponentLink2URL=https://datasheet.octopart.com:443/CC0805KKX7R7BB475-Yageo-datasheet-78855689.pdf?src-supplier=Upverter, ComponentLink3Description=https://datasheet.octopart.com:443/CC0805KKX7R7BB475-Yageo-datasheet-181969646.pdf?src-supplier=Newark, ComponentLink3URL=https://datasheet.octopart.com:443/CC0805KKX7R7BB475-Yageo-datasheet-181969646.pdf?src-supplier=Newark, ComponentLink4Description=https://datasheet.octopart.com:443/CC0805KKX7R7BB475-Yageo-datasheet-181969644.pdf?src-supplier=Newark, ComponentLink4URL=https://datasheet.octopart.com:443/CC0805KKX7R7BB475-Yageo-datasheet-181969644.pdf?src-supplier=Newark, ComponentLink5Description=https://datasheet.octopart.com:443/CC0805KKX7R7BB475-Yageo-datasheet-140260305.pdf?src-supplier=Newark, ComponentLink5URL=https://datasheet.octopart.com:443/CC0805KKX7R7BB475-Yageo-datasheet-140260305.pdf?src-supplier=Newark, ComponentLink6Description=https://datasheet.octopart.com:443/CC0805KKX7R7BB475-Yageo-datasheet-147453679.pdf?src-supplier=Newark, ComponentLink6URL=https://datasheet.octopart.com:443/CC0805KKX7R7BB475-Yageo-datasheet-147453679.pdf?src-supplier=Newark, ComponentLink7Description=https://datasheet.octopart.com:443/CC0805KKX7R7BB475-Yageo-Group-datasheet-188689702.pdf?src-supplier=Farnell, ComponentLink7URL=https://datasheet.octopart.com:443/CC0805KKX7R7BB475-Yageo-Group-datasheet-188689702.pdf?src-supplier=Farnell, ComponentLink8Description=https://datasheet.octopart.com:443/CC0805KKX7R7BB475-Yageo-datasheet-166511530.pdf?src-supplier=Future+Electronics, ComponentLink8URL=https://datasheet.octopart.com:443/CC0805KKX7R7BB475-Yageo-datasheet-166511530.pdf?src-supplier=Future+Electronics, ComponentLink9Description=https://datasheet.octopart.com:443/CC0805KKX7R7BB475-Yageo-datasheet-137700082.pdf?src-supplier=Future+Electronics, ComponentLink9URL=https://datasheet.octopart.com:443/CC0805KKX7R7BB475-Yageo-datasheet-137700082.pdf?src-supplier=Future+Electronics, ComponentLink10Description=https://datasheet.octopart.com:443/CC0805KKX7R7BB475-Yageo-datasheet-27626582.pdf?src-supplier=Future+Electronics, ComponentLink10URL=https://datasheet.octopart.com:443/CC0805KKX7R7BB475-Yageo-datasheet-27626582.pdf?src-supplier=Future+Electronics, ComponentLink11Description=https://datasheet.octopart.com:443/CC0805KKX7R7BB475-Yageo-Group-datasheet-165992755.pdf?src-supplier=ODG+(Origin+Data+Global), ComponentLink11URL=https://datasheet.octopart.com:443/CC0805KKX7R7BB475-Yageo-Group-datasheet-165992755.pdf?src-supplier=ODG+(Origin+Data+Global), ComponentLink12Description=https://datasheet.octopart.com:443/CC0805KKX7R7BB475-Yageo-datasheet-151948686.pdf?src-supplier=TME, ComponentLink12URL=https://datasheet.octopart.com:443/CC0805KKX7R7BB475-Yageo-datasheet-151948686.pdf?src-supplier=TME, ComponentLink13Description=https://datasheet.octopart.com/Surface-Mount-Ceramic-Multilayer-Capacitors%3B-General-Purpose-%26-High-Capacitance-Class-2%2C-X7R-Yageo-datasheet-family-114.pdf, ComponentLink13URL=https://datasheet.octopart.com/Surface-Mount-Ceramic-Multilayer-Capacitors%3B-General-Purpose-%26-High-Capacitance-Class-2%2C-X7R-Yageo-datasheet-family-114.pdf, ComponentLink14Description=https://datasheet.octopart.com/CC0805KKX7R7BB475-Yageo-datasheet-10883670.pdf, ComponentLink14URL=https://datasheet.octopart.com/CC0805KKX7R7BB475-Yageo-datasheet-10883670.pdf, ComponentLink15Description=http://sigma.octopart.com:80/rohs_statement/Surface-Mount-Ceramic-Multilayer-Capacitors%3B-General-Purpose-%26-High-Capacitance-Class-2%2C-X7R-Yageo-family-124.pdf?src-supplier=Compliance+Statements, ComponentLink15URL=http://sigma.octopart.com:80/rohs_statement/Surface-Mount-Ceramic-Multilayer-Capacitors%3B-General-Purpose-%26-High-Capacitance-Class-2%2C-X7R-Yageo-family-124.pdf?src-supplier=Compliance+Statements, ComponentLink16Description=http://sigma.octopart.com:80/reach_statement/Surface-Mount-Ceramic-Multilayer-Capacitors%3B-General-Purpose-%26-High-Capacitance-Class-2%2C-X7R-Yageo-family-125.pdf?src-supplier=Compliance+Statements, ComponentLink16URL=http://sigma.octopart.com:80/reach_statement/Surface-Mount-Ceramic-Multilayer-Capacitors%3B-General-Purpose-%26-High-Capacitance-Class-2%2C-X7R-Yageo-family-125.pdf?src-supplier=Compliance+Statements, ComponentLink17Description=http://sigma.octopart.com:80/conflict_mineral_statement/Yageo-company-3.pdf?src-supplier=Compliance+Statements, ComponentLink17URL=http://sigma.octopart.com:80/conflict_mineral_statement/Yageo-company-3.pdf?src-supplier=Compliance+Statements, ComponentLink18Description=http://sigma.octopart.com:80/rohs_statement/Yageo-company-2.pdf?src-supplier=Compliance+Statements, ComponentLink18URL=http://sigma.octopart.com:80/rohs_statement/Yageo-company-2.pdf?src-supplier=Compliance+Statements, Composition=Ceramic, Halogen Free="Halogen Free", Height=1.25mm, Lead Free="Lead Free", Length=2mm, Lifecycle Status=Production, Manufacturer Part Number=CC0805KKX7R7BB475, Material=Ceramic, Mounting Technology="Surface Mount", Number of Terminals=2, Packaging="Tape & Reel (TR)", Pricing="1=0.38, 10=0.224, 50=0.1656, 100=0.1475, 500=0.11696, 1000=0.10755 (USD)", REACH SVHC=Yes, RoHS=Compliant, Schedule B="8532240020, 8532240020|8532240020, 8532240020|8532240020|8532240020, 8532240020|8532240020|8532240020|8532240020", Stock=16960, Supplier=DigiKey, Supplier 1=DigiKey, Termination=SMD/SMT, Thickness=1.4478mm, Voltage Rating (DC)=16V, Weight=5.499807mg, Width=1.25mm